# Altium PCB IOT_PRoject_4layers.PcbDoc
Units mm, origin at the board's own origin, x right, y up, seen from the top; angles counter-clockwise.
Board outline 71 x 108.3 mm, 4 copper layers (Top Signal, +3.3V, GND, Bottom Signal), stack 0.603 mm thick; 54 components, 47 nets, 220 pads, 70 vias.
Unrouted connection lines stored in the file: 6.
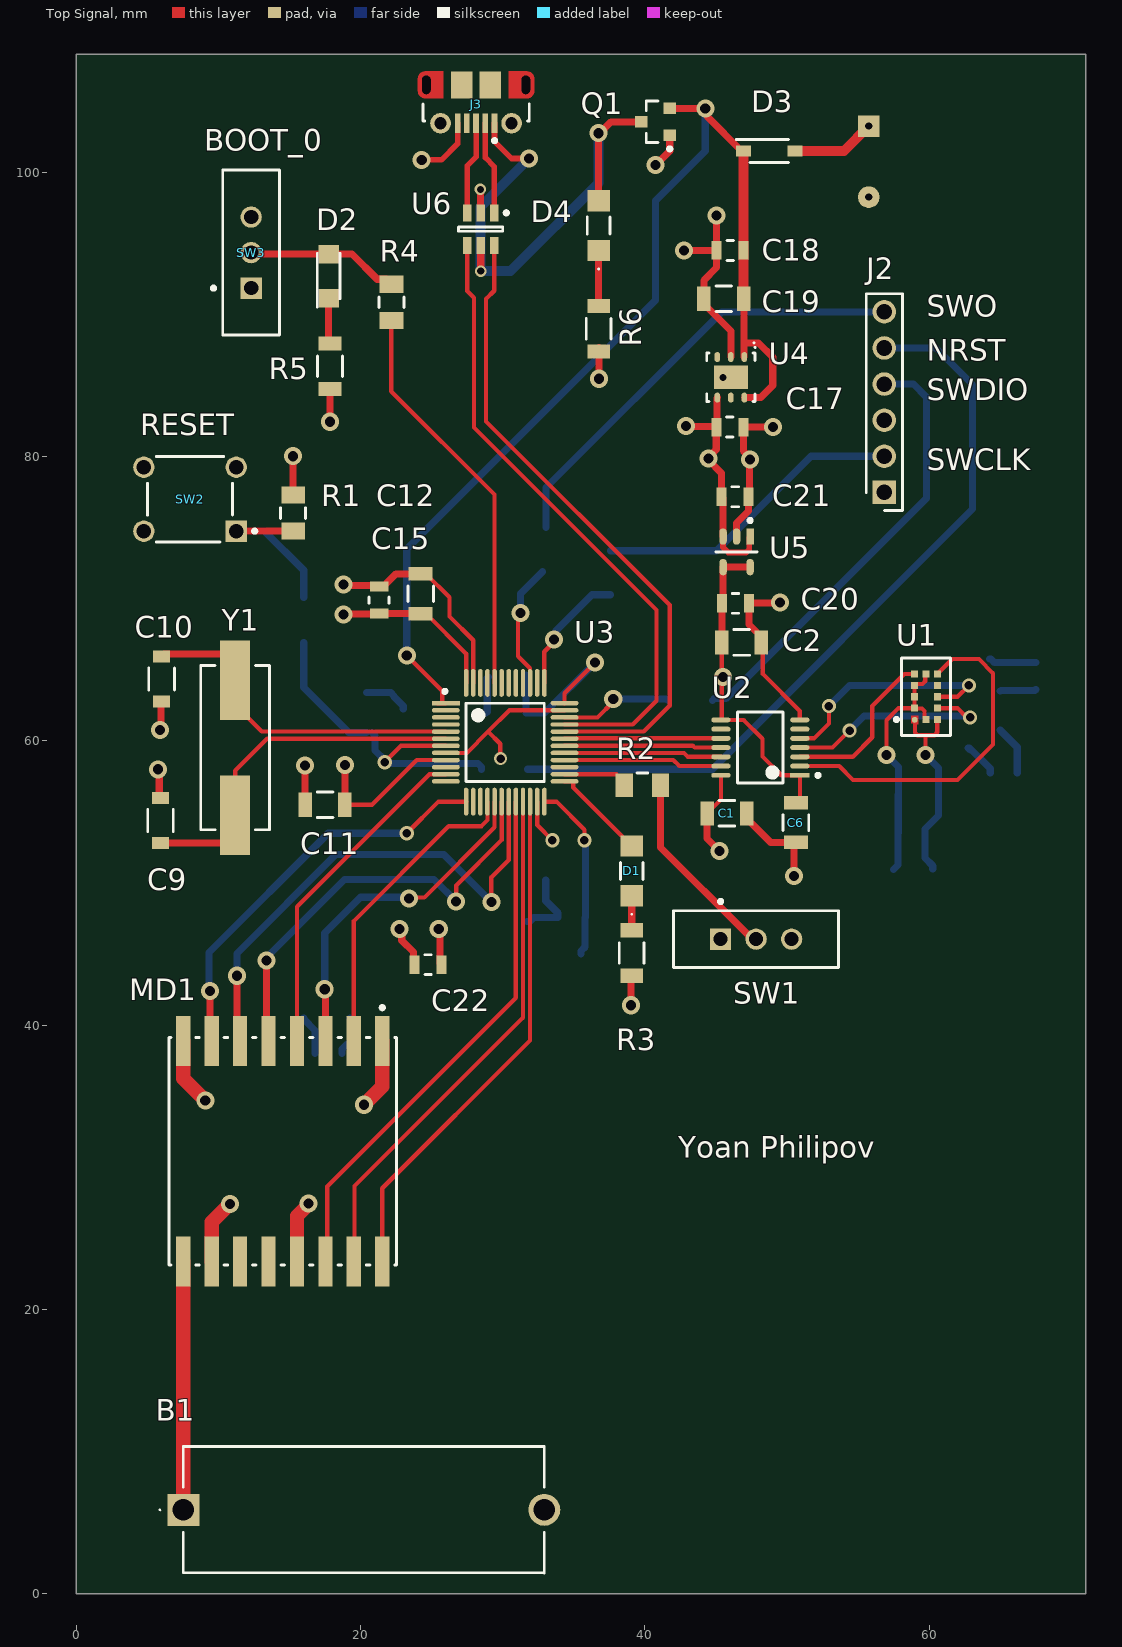
[diagram p0: Top Signal view]
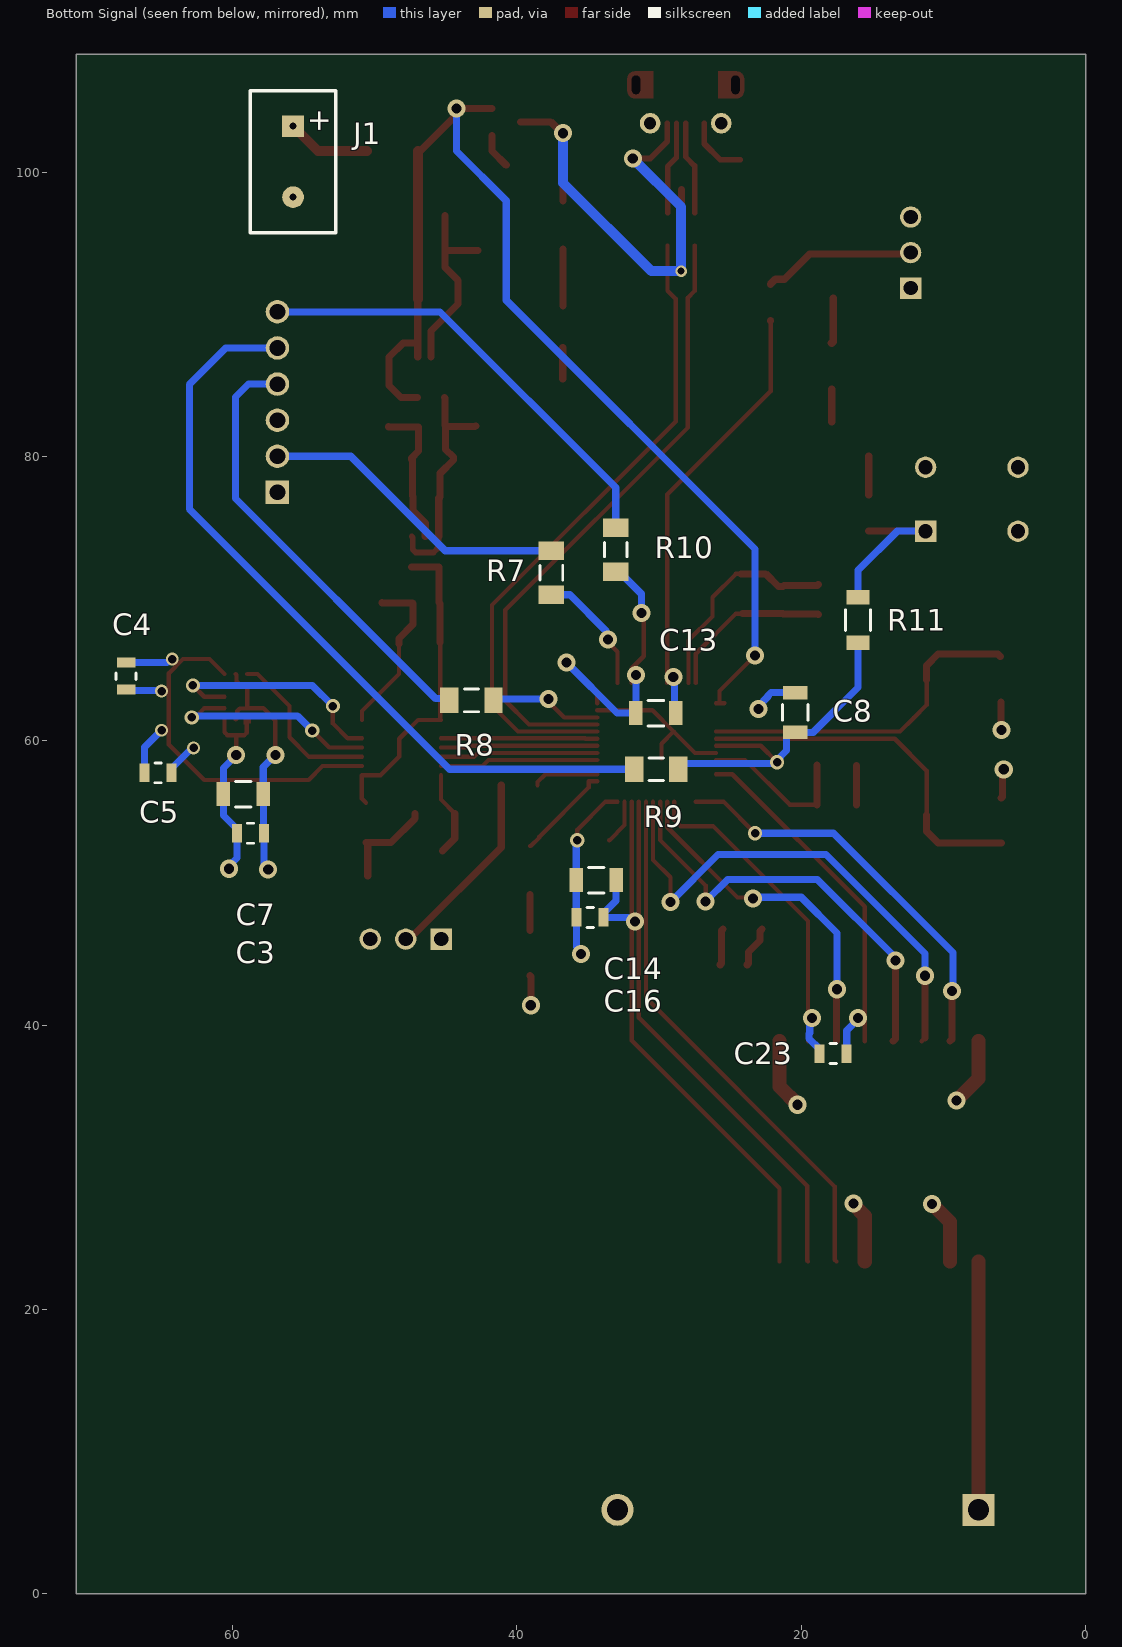
[diagram p1: Bottom Signal view, seen from below]
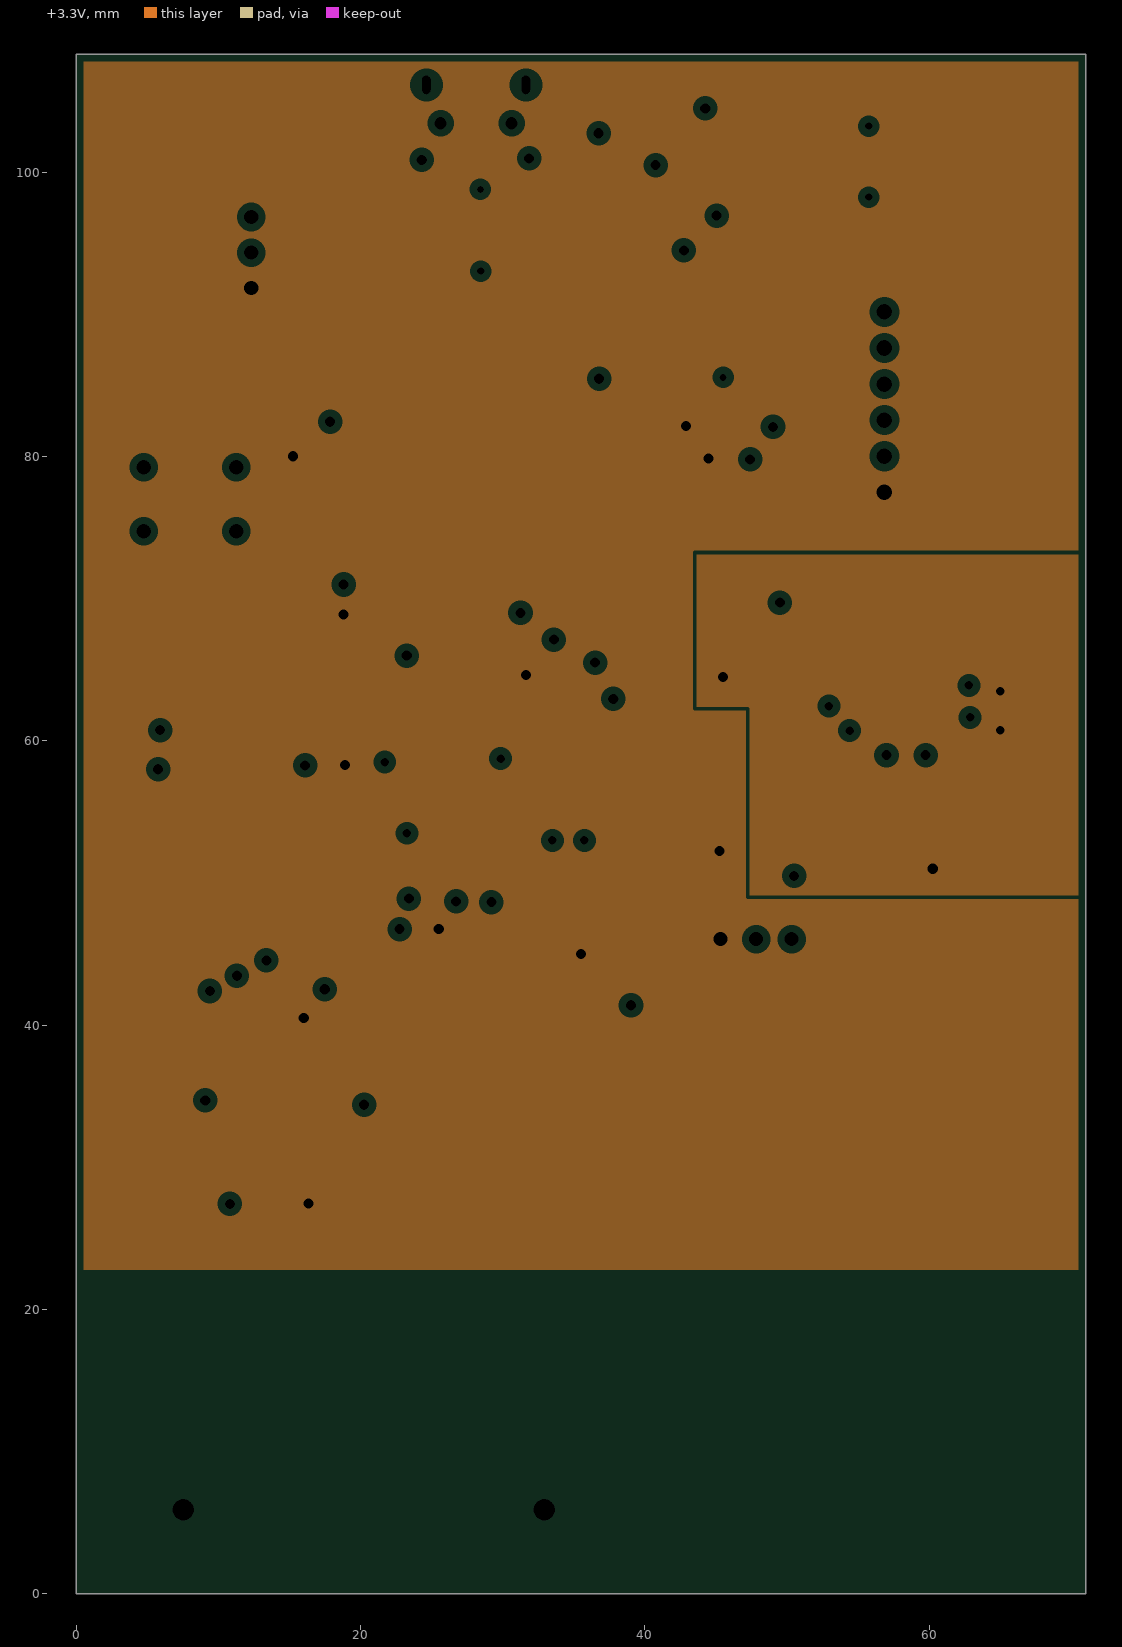
[diagram p2: +3.3V, clearances drawn from the general rule]
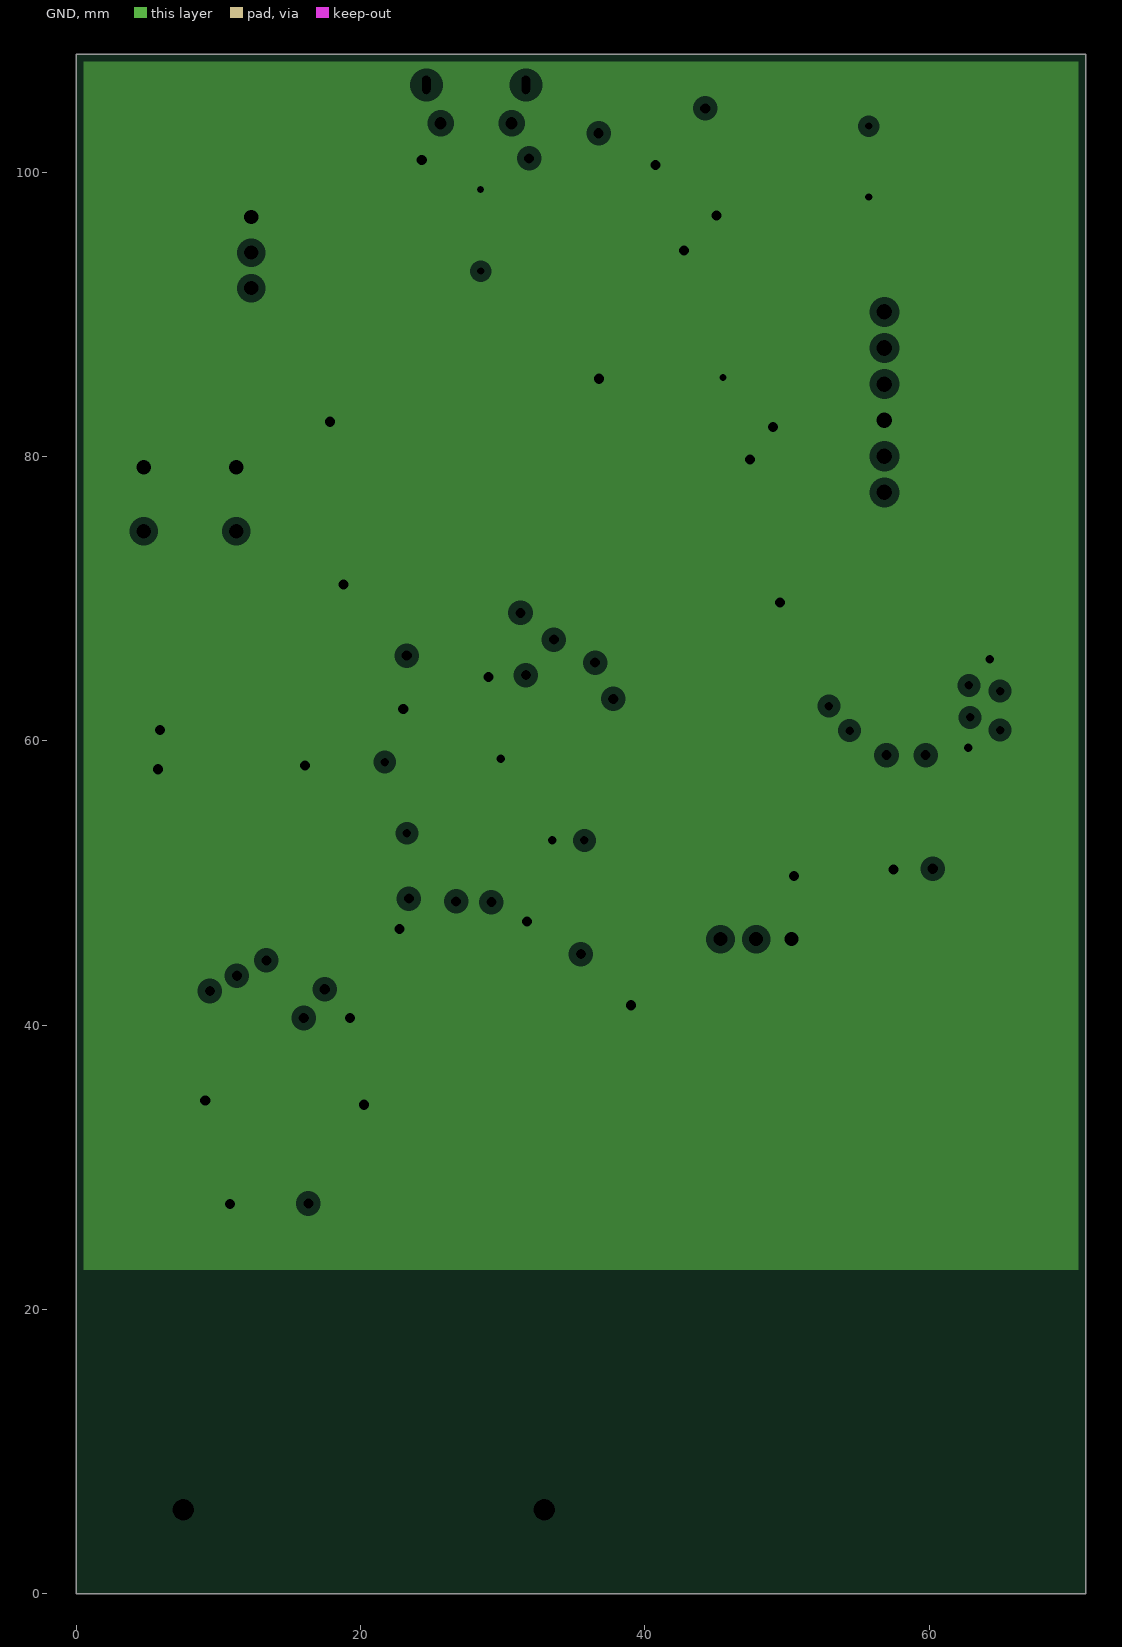
[diagram p3: GND, clearances drawn from the general rule]

## Layer stack, top to bottom
Top Solder: solder mask 0.0102, Solder Resist, Dk 3.5
Top Signal: signal copper 0.0356
Dielectric 2: prepreg 0.0711, PP-006, Dk 4.1
+3.3V: plane copper 0.035, net (Multiple Nets)
Dielectric 1: dielectric 0.32, FR-4, Dk 4.8
GND: plane copper 0.035, net GND
Dielectric 3: prepreg 0.0711, PP-006, Dk 4.1
Bottom Signal: signal copper 0.0356
Bottom Solder: solder mask 0.0102, Solder Resist, Dk 3.5

## Board outline
0,0 71,0 71,108.3 0,108.3

## Design rules (kind name [scope] priority, off if disabled: settings)
Clearance Clearance_3 [All] p1: gap=0.25 ignorepadtopadclearanceinfootprint=FALSE
Clearance Clearance_1 [OnMid vs OnMid] p2: gap=0.254 ignorepadtopadclearanceinfootprint=FALSE sourcerule=38 cellrowname=All cellrowtype=0 cellcolname=All cellcoltype=0 innerlayers=TRUE
Clearance Clearance_2 [(ExistsOnLayer('Top Signal') Or ExistsOnLayer('Bottom Signal')) vs (ExistsOnLayer('Top Signal') Or ExistsOnLayer('Bottom Signal'))] p3: gap=0.254 ignorepadtopadclearanceinfootprint=FALSE sourcerule=38 cellrowname=All cellrowtype=0 cellcolname=All cellcoltype=0 outerlayers=TRUE
Clearance [All] p4: gap=0.254 ignorepadtopadclearanceinfootprint=FALSE ismatrix=TRUE
DiffPairsRouting [All] p1: maxlimit=0.254 minlimit=0.254 mostfreqgap=0.254 toplayer_minwidth=0.381 toplayer_maxwidth=0.381 toplayer_prefwidth=0.381 bottomlayer_minwidth=0.381 bottomlayer_maxwidth=0.381 bottomlayer_prefwidth=0.381 maxuncoupledlength=12.7
HoleSize [All] p1: absolutevalues=TRUE maxlimit=6 minlimit=0.3 maxpercent=80.000 minpercent=20.000
PlaneClearance [All] p1: clearance=0.508
PlaneConnect [All] p1: planeconnectstyle=Direct reliefexpansion=0.508 reliefentries=4 reliefconductorwidth=0.254 reliefairgap=0.254
PolygonConnect [All] p1: connectstyle=Relief reliefconductorwidth=0.254 reliefentries=4 polygonreliefangle="90 Angle" airgapwidth=0.254
RoutingVias [All] p1: holewidth=0.711 width=1.27 viastyle="Through Hole" minholewidth=0.711 minwidth=1.27 maxholewidth=0.711 maxwidth=1.27
SolderMaskExpansion [All] p1: expansion=0.102 istentingtop=FALSE
Width MaxMinWidth_1 [All] p1: maxlimit=1 minlimit=0.3 preferedwidth=0.5 minimp=50.000000 maximp=50.000000 favimp=50.000000
Width [All] p2: maxlimit=0.254 minlimit=0.254 preferedwidth=0.254
26 further rules are at their usual default settings.

## Classes and differential pairs
component class VL53L3CX: C1 C2 C3 C4 C5 C6 C7 U1 U2
component class RFM95: B1 C22 C23 MD1
component class MCU: C8 C9 C10 C11 C12 C13 C14 C15 C16 D1 D2 R1 R2 R3 R4 R5 R11 SW1 SW2 SW3 U3 Y1
component class Connectors: J2 J3 R7 R8 R9 R10 U6
component class Board_Power: C17 C18 C19 C20 C21 D3 D4 J1 Q1 R6 U4 U5
differential pair D_USB_CONN: +USB_CONN_P -USB_CONN_N

## Components (designator, comment, footprint, x,y, rotation, side; value= is the part's Value field where it differs from the comment)
B1 "ANT-868-HETH" ANT-868-HETH-Footprint-1 20.225,5.9 r0 top
C1 "100nF" FP-C1206C-EB-MFG 45.775,54.9 r0 top
C2 "100nF" FP-C1206C-EB-MFG 46.8,66.925 r0 top
C3 "4u7" FP-GRM21B-0_15-MFG 58.75,53.5 r180 bottom
C4 "4u7" FP-GRM21B-0_15-MFG 67.5,64.55 r90 bottom
C5 "4u7" FP-GRM21B-0_15-MFG 65.25,57.75 r180 bottom
C6 "100nF" FP-C1206C-EB-MFG 50.625,54.25 r270 top
C7 "100nF" FP-C1206C-EB-MFG 59.25,56.25 r180 bottom
C8 "100nF" FP-C1206C-EB-MFG 20.425,62 r90 bottom
C9 "27pF" FP-GCM31A-0_2-MFG 5.925,54.4 r90 top
C10 "27pF" FP-GCM31A-0_2-MFG 6,64.35 r270 top
C11 "100nF" FP-C1206C-EB-MFG 17.5,55.5 r180 top
C12 "100nF" FP-C1206C-EB-MFG 24.225,70.35 r90 top
C13 "100nF" FP-C1206C-EB-MFG 30.225,61.95 r180 bottom
C14 "100nF" FP-C1206C-EB-MFG 34.425,50.2 r180 bottom
C15 "4u7" FP-GRM21B-0_15-MFG 21.3,69.9 r90 top
C16 "4u7" FP-GRM21B-0_15-MFG 34.85,47.575 r180 bottom
C17 "4u7" FP-GRM21B-0_15-MFG 45.975,82.075 r0 top
C18 "4u7" FP-GRM21B-0_15-MFG 46,94.5 r180 top
C19 "100nF" FP-C1206C-EB-MFG 45.55,91.1 r180 top
C20 "4u7" FP-GRM21B-0_15-MFG 46.375,69.675 r0 top
C21 "4u7" FP-GRM21B-0_15-MFG 46.35,77.175 r0 top
C22 "4u7" FP-GRM21B-0_15-MFG 24.75,44.25 r180 top
C23 "4u7" FP-GRM21B-0_15-MFG 17.75,38 r0 bottom
D1 "GREEN" 156120VS75000-Footprint-1 39.075,50.85 r90 top
D2 "RED" 156120RS75000-Footprint-1 17.75,92.7 r90 top
D3 "B5819W-TP" B5819W-TP-Footprint-1 48.75,101.5 r0 top
D4 "GREEN" 156120VS75000-Footprint-1 36.75,96.25 r90 top
J1 "232" 1043P-Footprint-1 55.75,100.75 r90 bottom
J2 "M20-9990645" M20-9990645-Footprint-1 56.85,77.48 r90 top
J3 "105017-0001" USB-MICRO-B_V 28.125,104.8 r180 top
MD1 "RFM95W-868S2" FP-RFM95W-868S2-MFG 14.525,31.125 r270 top
Q1 "NTR1P02T1G" ONSC-SOT-23-3-318-08_V 40.75,103.55 r180 top
R1 "10k" FP-RMCF1206-IPC_C 15.25,76.026 r270 top
R2 "10k" FP-RMCF1206-IPC_C 39.825,56.875 r0 top
R3 "1k" FP-RMCF1206-MFG 39.075,45.075 r270 top
R4 "10k" FP-RMCF1206-IPC_C 22.175,90.85 r90 top
R5 "1k" FP-RMCF1206-MFG 17.85,86.35 r270 top
R6 "1k" FP-RMCF1206-MFG 36.75,89 r270 top
R7 "22R" RESC3216X60X45ML10T20 37.575,71.825 r90 bottom
R8 "22R" RESC3216X60X45ML10T20 43.2,62.85 r0 bottom
R9 "22R" RESC3216X60X45ML10T20 30.2,58 r0 bottom
R10 "22R" RESC3216X60X45ML10T20 33.05,73.45 r90 bottom
R11 "1k" FP-RMCF1206-MFG 16,68.5 r270 bottom
SW1 "EG1218" ESWI-EG1218_V 47.825,46.05 r0 top
SW2 "B3F-1000" OMRON-B3F-1000-4_V 8,77 r180 top
SW3 "EG1218" ESWI-EG1218_V 12.3,94.35 r90 top
U1 "VL53L3CXV0DH/1" FP-LGA-12-DM00392521-MFG 59.775,63.1 r0 top
U2 "TXS0104EQPWRQ1" FP-PW0014A-IPC_C 48.125,59.525 r180 top
U3 "STM32L412CBT6" FP-LQFP48-5B-IPC_A 30.175,59.9 r0 top
U4 "LD39050PU33R" DFN6D_L 46.05,85.575 r270 top locked
U5 "MIC5504-2.8YM5-TR" FP-SOT23-5LD-PL-1-IPC_C 46.45,73.3 r270 top
U6 "USBLC6-2SC6" STM-SOT23-6L_V 28.45,96 r270 top
Y1 "ABLS-8.000MHZ-B2-T" FP-ABLS-MFG 11.175,59.525 r90 top

## Footprints (in the part's own frame and the unit in brackets; to place one, negate y for a bottom-side part, rotate by r counter-clockwise, add the part's x,y. Pads: shape width x height; smd on the part's side, far side on the other; paste and mask are expansions set on the pad)
1043P-Footprint-1 [mm]
  round 1.524 hole 0.5: 1(-2.5,0)
  rect 1.524x1.524 hole 0.5: 2(2.5,0)
  silkscreen extent -5,-3 5,3
156120RS75000-Footprint-1 [mm]
  rect 1.3x1.45 smd: 1(-1.55,0) 2(1.55,0)
  silkscreen extent -2.2,-0.8 1.6,0.8
156120VS75000-Footprint-1 [mm]
  rect 1.5x1.6 smd: 1(-1.75,0) 2(1.75,0)
  silkscreen extent -3.1,-0.8 0.6,0.8
ANT-868-HETH-Footprint-1 [mm]
  rect 2.25x2.25 hole 1.5: 1(-12.7,0)
  round 2.25 hole 1.5: 2(12.7,0)
  silkscreen extent -14.4,-4.45 12.7,4.45
B5819W-TP-Footprint-1 [mm]
  rect 1.05x0.75 smd: 1(-1.8,0) 2(1.8,0)
  silkscreen extent -2.32,-0.8 1.35,0.8
DFN6D_L [mm] "SON, 6-Leads, Body 3x3mm, Pitch 0.95mm, Thermal Pad 2.4x1.65mm, IPC High Density"
  oval 0.7x0.4 smd: 1(-1.425,0.95) 2(-1.425,0) 3(-1.425,-0.95) 4(1.425,-0.95) 5(1.425,0) 6(1.425,0.95)
  rect 1.65x2.4 smd: 7(0,0)
  silkscreen extent -2.15,-1.7 1.7,1.75, body extent -1.55,-1.55 1.55,1.55, height 0.95
ESWI-EG1218_V [mm] "THD, 3-Leads, Body 11.6x4mm, Pitch 2.5mm"
  rect 1.5x1.5 hole 1: 1(-2.5,0)
  round 1.5 hole 1: 2(0,0) 3(2.5,0)
  silkscreen extent -5.8,-2 5.8,2.77, body extent -5.8,-2 5.8,2, height 7.4
FP-ABLS-MFG [mm]
  rect 5.6x2.1 smd paste+0 mask+0: 1(-4.75,0) 2(4.75,0)
  silkscreen extent -5.77,-2.42 5.77,2.42, body extent -7.65,-2.52 7.65,2.52, height 0.25
FP-C1206C-EB-MFG [mm]
  rect 0.95x1.7 smd paste+0 mask+0: 1(-1.4,0) 2(1.4,0)
  silkscreen extent -0.55,-0.9 0.55,0.9, body extent -2,-1 2,1, height 0.25
FP-GCM31A-0_2-MFG [mm]
  rect 0.85x1.2 smd paste+0 mask+0: 1(-1.575,0) 2(1.575,0)
  silkscreen extent -0.77,-0.9 0.77,0.9, body extent -2.1,-1 2.1,1, height 0.25
FP-GRM21B-0_15-MFG [mm]
  rect 0.7x1.3 smd paste+0 mask+0: 1(-0.95,0) 2(0.95,0)
  silkscreen extent -0.23,-0.7 0.23,0.7, body extent -1,-0.63 1,0.63, height 1.4
FP-LGA-12-DM00392521-MFG [mm]
  round 0.412 smd paste+0 mask+0: 1(-0.791,-1.621)
  rect 0.5x0.5 smd paste+0 mask+0: 2(-0.8,-0.8) 3(-0.8,0) 4(-0.8,0.8) 5(-0.8,1.6) 6(0,1.6) 7(0.8,1.6) 8(0.8,0.8) 9(0.8,0) 10(0.8,-0.8) 11(0.8,-1.6) 12(0,-1.6)
  Top Signal region: -1.05,-1.35 -1.05,-1.85 -0.8,-1.85 -0.8,-1.93 -0.55,-1.93 -0.55,-1.35
  silkscreen extent -2.2,-2.73 1.73,2.73, body extent -1.73,-2.73 1.73,2.73, height 0.25
FP-LQFP48-5B-IPC_A [mm]
  rect 1.955x0.312 smd paste+0 mask+0: 1(-4.175,2.75)
  rrect100% 1.955x0.312 smd paste+0 mask+0: 2(-4.175,2.25) 3(-4.175,1.75) 4(-4.175,1.25) 5(-4.175,0.75) 6(-4.175,0.25) 7(-4.175,-0.25) 8(-4.175,-0.75) 9(-4.175,-1.25) 10(-4.175,-1.75) 11(-4.175,-2.25) 12(-4.175,-2.75) 25(4.175,-2.75) 26(4.175,-2.25) 27(4.175,-1.75) 28(4.175,-1.25) 29(4.175,-0.75) 30(4.175,-0.25) 31(4.175,0.25) 32(4.175,0.75) 33(4.175,1.25) 34(4.175,1.75) 35(4.175,2.25) 36(4.175,2.75)
  rrect100% 0.312x1.955 smd paste+0 mask+0: 13(-2.75,-4.175) 14(-2.25,-4.175) 15(-1.75,-4.175) 16(-1.25,-4.175) 17(-0.75,-4.175) 18(-0.25,-4.175) 19(0.25,-4.175) 20(0.75,-4.175) 21(1.25,-4.175) 22(1.75,-4.175) 23(2.25,-4.175) 24(2.75,-4.175) 37(2.75,4.175) 38(2.25,4.175) 39(1.75,4.175) 40(1.25,4.175) 41(0.75,4.175) 42(0.25,4.175) 43(-0.25,4.175) 44(-0.75,4.175) 45(-1.25,4.175) 46(-1.75,4.175) 47(-2.25,4.175) 48(-2.75,4.175)
  silkscreen extent -4.38,-2.75 2.75,3.71, body extent -5.65,-5.65 5.65,5.65, height 0.25
FP-PW0014A-IPC_C [mm]
  rect 1.355x0.341 smd paste+0 mask+0: 1(-2.775,1.95)
  rrect100% 1.355x0.341 smd paste+0 mask+0: 2(-2.775,1.3) 3(-2.775,0.65) 4(-2.775,0) 5(-2.775,-0.65) 6(-2.775,-1.3) 7(-2.775,-1.95) 8(2.775,-1.95) 9(2.775,-1.3) 10(2.775,-0.65) 11(2.775,0) 12(2.775,0.65) 13(2.775,1.3) 14(2.775,1.95)
  silkscreen extent -4.18,-2.5 1.6,2.5, body extent -3.55,-2.6 3.55,2.6, height 0.25
FP-RFM95W-868S2-MFG [mm]
  rect 3.5x1 smd paste+0 mask+0: 1(-7.75,7) 2(-7.75,5) 3(-7.75,3) 4(-7.75,1) 5(-7.75,-1) 6(-7.75,-3) 7(-7.75,-5) 8(-7.75,-7) 9(7.75,-7) 10(7.75,-5) 11(7.75,-3) 12(7.75,-1) 13(7.75,1) 14(7.75,3) 15(7.75,5) 16(7.75,7)
  silkscreen extent -10.22,-8 8,8, body extent -9.6,-8.1 9.6,8.1, height 0.25
FP-RMCF1206-IPC_C [mm]
  rect 1.204x1.658 smd paste+0 mask+0: 1(-1.276,0) 2(1.276,0)
  silkscreen extent -0.37,-0.87 0.37,0.87, body extent -1.98,-0.97 1.98,0.97, height 0.25
FP-RMCF1206-MFG [mm]
  rect 1x1.6 smd paste+0 mask+0: 1(-1.6,0) 2(1.6,0)
  silkscreen extent -0.72,-0.87 0.72,0.87, body extent -2.2,-0.97 2.2,0.97, height 0.25
FP-SOT23-5LD-PL-1-IPC_C [mm]
  rect 1.156x0.53 smd paste+0 mask+0: 1(-1.075,0.95)
  rrect100% 1.156x0.53 smd paste+0 mask+0: 2(-1.075,0) 3(-1.075,-0.95) 4(1.075,-0.95) 5(1.075,0.95)
  silkscreen extent -2.33,-1.45 0,1.45, body extent -1.75,-1.55 1.75,1.55, height 0.25
M20-9990645-Footprint-1 [mm]
  rect 1.65x1.65 / inner round 1.65 / far side rect 1.65x1.65 hole 1.1: 1(0,0)
  round 1.65 hole 1.1: 2(2.54,0) 3(5.08,0) 4(7.62,0) 5(10.16,0) 6(12.7,0)
  silkscreen extent -1.27,-1.27 13.97,1.27
OMRON-B3F-1000-4_V [mm] "TH, 4-Leads, Body 6x6mm"
  rect 1.5x1.5 hole 1 paste-2539.97: 1(-3.25,2.25)
  round 1.5 hole 1 paste-2539.97: 2(3.25,2.25) 4(3.25,-2.25)
  round 1.5 hole 1 paste-2539.97 mask+0.102: 3(-3.25,-2.25)
  silkscreen extent -4.68,-3 3,3, body extent -3.4,-3 3.4,3, height 4.5
ONSC-SOT-23-3-318-08_V [mm] "SOT23, 3-Leads, Body 2.92x1.3mm, Pitch 0.95mm"
  rect 0.9x0.8 smd: 1(-1,0.95) 2(-1,-0.95) 3(1,0)
  silkscreen extent -1.13,-1.46 0.65,2.02, body extent -0.65,-1.46 0.65,1.46, height 1.11
RESC3216X60X45ML10T20 [mm] "Chip Resistor, 2-Leads, Body 3.20x1.60mm, IPC Low Density"
  rect 1.3x1.8 smd: 1(-1.55,0) 2(1.55,0)
  silkscreen extent -0.5,-0.8 0.5,0.8, body extent -1.65,-0.85 1.65,0.85, height 0.6
STM-SOT23-6L_V [mm] "SOT23, 6-Leads, Body 3.05x1.75mm, Pitch 0.95mm"
  rect 1.2x0.6 smd: 1(-1.15,0.95) 2(-1.15,0) 3(-1.15,-0.95) 4(1.15,-0.95) 5(1.15,0) 6(1.15,0.95)
  silkscreen extent -1.27,-1.55 0.15,1.93, body extent -1.6,-1.53 1.6,1.53, height 1.45
USB-MICRO-B_V [mm] "USB, MICRO B, Body 7.491x4.695 mm, Pitch 0.65 mm"
  rect 0.4x1.35 smd: 1(-1.3,1.35) 2(-0.65,1.35) 3(0,1.35) 4(0.65,1.35) 5(1.3,1.35)
  round 1.45 hole 0.85: 6(-2.5,1.35) 7(2.5,1.35)
  rrect50% 0x0 hole 0.6 slot 1.3 at 90 deg: 8(-3.5,-1.35) 11(3.5,-1.35)
  rect 1.5x1.9 smd: 9(-1,-1.35) 10(1,-1.35)
  Top Signal circle w0.5: c-3.6,-1.8 r0.25
  Top Signal circle w0.5: c-3.6,-0.9 r0.25
  Top Signal circle w0.5: c3.6,-1.8 r0.25
  Top Signal circle w0.5: c3.6,-0.9 r0.25
  Top Signal region: -3.6,-1.8 -3.6,-0.9 -4.1,-0.9 -4.1,-1.8
  Top Signal region: 3.6,-0.9 3.6,-1.8 4.1,-1.8 4.1,-0.9
  Top Signal region: 2.3,-0.4 2.3,-2.3 3.6,-2.3 3.6,-0.4
  Top Signal region: -2.3,-2.3 -2.3,-0.4 -3.6,-0.4 -3.6,-2.3
  silkscreen extent -3.75,-0.01 3.75,2.7, body extent -4.1,-3.9 4.1,1.5, height 2.67

## Part data
B1: library part CMP-00030-00001-2, "RF/Microwave Antenna"
C1 C2 C6 C7 C8 C11 C12 C13 C14 C19: library part CMP-03020-021070-1, "CAP CER 0.1UF 16V 10% X7R 1206"
C3 C4 C5 C15 C16 C17 C18 C20 C21 C22 C23: library part CMP-06035-005997-1, "Chip Multilayer Ceramic Capacitors for General Purpose, 0805, 4.7uF, X7R, 15%, 10%, 10V"
C9 C10: library part CMP-06035-011656-1, "Ceramic Capacitor for Automotive 27pF ±1% 1kVDC C0G 1206 Paper T/R"
D1 D4: library part CMP-007-00036-1, "Single Color LED"
D2: library part CMP-007-00037-1, "Single Color LED"
D3: library part CMP-004-00032-1, "Rectifier Diode, Schottky, 1 Phase, 1 Element, 1A, 40V V(RRM), Silicon"
J1: library part CMP-00029-00001-3, "Batteries/Accessories"
J2: library part CMP-002-00072-1, "Board Connector, 6 Contact(s), 1 Row(s), Male, Straight, 0.1 inch Pitch, Solder Terminal, Locking, Black Insulator"
J3: library part CMP-2000-05827-1, "Micro-USB B Receptacle, Right Angle, Bottom Mount, Surface Mount, with Solder Tabs, -30 to 85 degC, 5-Pin USB, RoHS, Tape and Reel"
MD1: library part CMP-204316-000001-1, "RX TXRX MODULE ISM < 1GHZ SMD"
Q1: library part CMP-1058-00751-1, "Power MOSFET, -20 V, -1 A, P-Channel, 3-Pin SOT-23, Pb-Free, Tape and Reel"
R1 R2 R4: library part CMP-26527-000061-1, "10kΩ ±5% 0.25W 1206 Thick Film Chip Resistor AEC-Q200 compliant"
R3 R5 R6 R11: library part CMP-26527-000044-1, "1kΩ ±5% 0.25W 1206 Thick Film Chip Resistor AEC-Q200 compliant"
R7 R8 R9 R10: library part CMP-2003-01966-1
SW1 SW3: library part CMP-011-00006-2, "Slide Switch, SPDT, 500 V, -20 to 70 degC, 3-Pin THD, RoHS, Bulk"
SW2: library part CMP-011-00004-2, "Tactile Switch, SPST-NO, 0.05 A, 24 V, -25 to 70 degC, 4-Pin THD, RoHS, Bulk"
U1: library part CMP-12178-000002-1, "TIME-OF-FLIGHT PROXIMITY SENSOR"
U2: library part CMP-04899-000064-1, "IC TRNSLTR BIDIRECTIONAL 14TSSOP"
U3: library part CMP-12105-000110-1, "IC MCU 32BIT 128KB FLASH 48LQFP"
U4: library part CMP-0244-00288-1, "500 mA Low Quiescent Current Low Noise Voltage Regulator, 3.3V, 6-Pin VDFDPN, Tape and Reel"
U5: library part CMP-06324-000050-1, "IC REG LINEAR 2.8V 300MA SOT23-5"
U6: library part CMP-00024-00006-1, "Trans Voltage Suppressor Diode, 5V V(RWM), Unidirectional, 1 Element, Silicon"
Y1: library part CMP-27762-009874-1, "CRYSTAL 8.0000MHZ 18PF SMD"

## Via types
v1: diameter 1.27, hole 0.711, Top Signal to Bottom Signal, 24 vias
v2: diameter 1.27, hole 0.711, Top Signal to GND, 13 vias
v3: diameter 1.27, hole 0.711, Top Signal to +3.3V, 8 vias
v4: diameter 1, hole 0.6, Top Signal to Bottom Signal, 7 vias
v5: diameter 1.27, hole 0.711, GND to Bottom Signal, 5 vias
v6: diameter 1.27, hole 0.711, +3.3V to Bottom Signal, 4 vias
v7: diameter 0.9, hole 0.6, GND to Bottom Signal, 2 vias
v8: diameter 0.9, hole 0.6, +3.3V to Bottom Signal, 2 vias
v9: diameter 0.8, hole 0.5, Top Signal to GND, 2 vias
v10: diameter 1, hole 0.6, Top Signal to GND, 1 vias
v11: diameter 0.9, hole 0.6, Top Signal to GND, 1 vias
v12: diameter 0.8, hole 0.5, Top Signal to Bottom Signal, 1 vias

## Nets (pads, with @x,y where several pads share a name; then routed paths per layer and width w, separated by ;. In a path a pad name is that pad's centre, name@x,y a point inside that pad or via, vN(x,y) a via of type N, cw(c..) or ccw(c..) an arc to the next point about the centre after c; other vN are vias at no path point)
+2.8V: C2.1 C3.1 C4.1 C5.1 C6.1 C7.1 C20.1 U1.1 U1.11 U2.1 U2.8 U5.4 U5.5 | length 42.8
  Top Signal w0.3: U2.8 U2.8@45.381,61.475 ; C2.1 45.4,61.494 U2.8@45.381,61.475 ; C6.1 50.92,55.945 50.92,57.556 U2.1 49.6,57.575 48.275,58.9 48.275,60.15 46.95,61.475 U2.8@45.381,61.475 ; U1.1 59.002,61.46 59.002,60.576 59.178,60.4 59.75,60.4 ; 59.75,58.997 59.75,60.4 ; U1.11 60.575,60.6 60.375,60.4 59.75,60.4
  Top Signal w0.5: C2.1 45.412,66.938 45.412,69.663 C20.1 45.494,69.744 45.494,72.219 U5.4 U5.5
  Bottom Signal w0.5: 59.75,59 60.65,58.1 C7.1 60.65,54.75 59.7,53.8 59.7,51.758 60.25,51.208 v6(60.25,51) ; 62.75,59.5 62.897,59.353 ; v8(65,60.75) 66.2,59.55 C5.1 ; v8(65,63.5) 65.05,63.55 67.45,63.55 C4.1
  other v3: 45.5,64.5
+3.3V: C1.1 C11.1 C12.1 C13.1 C14.1 C15.1 C16.1 C17.1 C21.1 C22.1 C23.1 J2.1 MD1.13 R1.1 SW1.1 SW3.1 U2.14 U3.9 U3.24 U3.36 U3.48 U4.4 U5.1 U5.3 | length 83.3
  Top Signal w0.3: C11.1 20.8,55.5 23.95,58.65 U3.9 ; C12.1@24.112,68.95 C12.1 24.6,68.95 27.425,66.125 U3.48 ; U3.24 33.775,55.725 35.75,53.75 35.75,53 ; U3.36 34.35,63.35 36.5,65.5 ; C1.1 45.35,55.875 U2.14
  Top Signal w0.4: U5.3 45.5,73.625 45.875,73.25 47.114,73.25 47.335,73.471 47.335,74.31 U5.1
  Top Signal w0.5: R1.1 v3(15.25,80.026) ; v3(18.8,68.9) 18.825,68.925 21.275,68.925 C15.1@21.288,68.937 ; C11.1 v3(18.9,58.3) ; C15.1 C12.1@24.112,68.95 ; v3(25.5,46.75) 25.6,46.65 25.6,44.35 C22.1 ; v3(42.9,82.15) 42.938,82.112 C17.1@44.988,82.112 ; C1.1 44.375,53.125 v3(45.25,52.25) ; U4.4 45.063,84.112 45.063,82.187 C17.1@44.988,82.112 ; U5.3 45.5,77.075 C21.1 45.4,78.825 44.475,79.75 v3(44.475,79.854) 44.475,79.958 45.025,80.508 C17.1 C17.1@44.988,82.112
  Top Signal w1: MD1.13 15.525,26.577 16.325,27.377 v1(16.325,27.45)
  Bottom Signal w0.5: v6(16,40.5) 16,40.424 16.8,39.624 C23.1 ; v6(31.625,64.625) C13.1 32.95,61.95 36.5,65.5 ; v6(35.5,45) 35.5,45.208 35.8,45.508 C16.1 ; C16.1@35.825,47.568 C14.1 35.825,52.925
+Vbat: D3.2 J1.2 | length 5.9
  Top Signal w0.7: D3.2 54,101.5 J1.2
DIO0: MD1.14 U3.20 | length 37.9
  Top Signal w0.3: MD1.14 17.649,23.499 17.649,28.649 30.925,41.925 U3.20
DIO1: MD1.15 U3.21 | length 37.3
  Top Signal w0.3: MD1.15 19.574,23.424 19.574,28.674 31.425,40.525 U3.21
DIO2: MD1.16 U3.22 | length 36.7
  Top Signal w0.3: MD1.16 21.525,28.525 31.925,38.925 U3.22
DIO5: MD1.7 U3.13 | length 28.8
  Top Signal w0.3: v4(23.25,53.5) 25.475,55.725 U3.13
  Top Signal w0.5: v1(9.4,42.4) 9.4,39 MD1.7
  Bottom Signal w0.3: v1@9.326,42.474 v1(9.4,42.4)
  Bottom Signal w0.5: v1@9.326,42.474 9.326,45.101 17.725,53.5 v4(23.25,53.5)
GND: C1.2 C2.2 C3.2 C4.2 C5.2 C6.2 C7.2 C8.2 C9.2 C10.2 C11.2 C12.2 C13.2 C14.2 C15.2 C16.2 C17.2 C18.2 C19.2 C20.2 C21.2 C22.2 C23.2 J1.1 J2.3 J3.5 MD1.1 MD1.8 MD1.10 Q1.1 R3.2 R5.2 R6.2 SW1.3 SW2.3 SW2.4 SW3.3 U1.2 U1.3 U1.4 U1.6 U1.12 U2.7 U3.8 U3.23 U3.35 U3.47 U4.2 U4.7 U5.2 U6.2 | length 150
  Top Signal w0.3: C12.2 24.6,71.75 26.25,70.1 26.25,68.75 27.925,67.075 U3.47 ; U3.8 27.475,59.15 28.975,60.65 ; v11(29.85,58.75) 29.825,58.775 29.825,59.8 28.975,60.65 ; U3.23 32.425,54.075 v10(33.5,53) ; U3.35 30.475,62.15 28.975,60.65 ; C2.2@48.299,66.826 48.299,64.701 50.9,62.1 U2.7 ; 57,59 57,61.45 57.85,62.3 U1.2 ; U1.12 59.675,61.6 59.675,62.099 59.499,62.275 59,62.275 U1.2 ; U1.6 59.725,64.65 59.725,64.2 59.525,64 59.075,64 U1.4 U1.3 U1.2
  Top Signal w0.4: v2(24.3,100.875) 25.69,100.875 26.825,102.01 J3.5
  Top Signal w0.5: v1(5.75,58) 5.837,57.912 5.837,56.063 C9.2 ; v1@5.95,60.8 C10.2@5.95,62.725 ; C11.2 v2(16.1,58.275) ; v2(17.85,82.45) R5.2 ; v2(18.8,71) 18.875,70.925 21.225,70.925 C15.2 21.6,70.85 22.5,71.75 C12.2 ; v2(22.75,46.75) 22.897,46.603 22.897,45.953 23.711,45.139 23.711,44.339 C22.2 ; U6.2@28.425,97.175 v9(28.425,98.8) ; v2(36.775,85.475) R6.2@36.775,87.675 ; v1(39.025,41.4) 39.025,43.425 R3.2 ; v2(40.75,100.5) 41.75,101.5 Q1.1 ; v2(42.75,94.5) C18.2 ; v2(45.05,96.95) C18.2 ; U4.2 46.05,88.825 44.15,90.725 44.15,92.4 45.05,93.3 C18.2 ; U5.2 46.45,75.325 47.3,76.175 C21.2 47.35,77.225 47.35,79.754 v2(47.4,79.804) 47.4,79.908 46.925,80.383 C17.2 46.938,82.087 v2(49.013,82.087) v2@49.025,82.1 ; C1.2 47.175,54.525 48.85,52.85 C6.2 50.5,52.725 v2(50.5,50.5) ; C2.2@48.299,66.826 48.299,67.201 47.325,68.175 C20.2 47.35,69.7 49.475,69.7 v2(49.5,69.725)
  Top Signal w1: MD1.8 7.525,36.25 v1(9.075,34.7) ; MD1.10 9.525,26.15 v1(10.8,27.425) ; v1(20.25,34.4) 21.525,35.675 MD1.1
  Bottom Signal w0.5: C23.2 18.7,38.3 19.465,39.065 19.465,39.396 19.397,39.464 19.397,40.353 v5(19.25,40.5) ; C8.2 22.121,63.4 22.355,63.166 22.355,63.103 23,62.458 v5(23,62.25) ; C13.2 28.912,62.038 28.912,64.412 v5(29,64.5) ; v5(31.7,47.3) 31.908,47.3 32.183,47.575 C16.2 33.9,47.875 33.025,48.75 C14.2 ; 57,59.25 57,59 57.85,58.15 C7.2 57.825,56.225 57.825,53.525 C3.2 57.8,51.258 v5(57.5,50.958) ; v7(62.75,59.5) 62.85,59.5 64.3,58.05 C5.2 ; v7(64.25,65.75) 64.358,65.75 64.608,65.5 C4.2
  other v1: 5.9,60.75
  other v9: 45.5,85.575
MISO: MD1.2 U3.16 | length 22.1
  Top Signal w0.3: MD1.2 19.525,47.325 26.2,54 28.5,54 28.925,54.425 U3.16
MOSI: MD1.3 U3.17 | length 24.5
  Top Signal w0.3: v1(17.475,42.525) v1@17.525,42.475 ; v1(23.4,48.9) 23.485,48.985 24.485,48.985 29.425,53.925 U3.17
  Top Signal w0.5: MD1.3 v1@17.525,42.475
  Bottom Signal w0.5: v1(17.475,42.525) 17.475,46.475 20,49 23.3,49 v1(23.4,48.9)
NetB1_1: B1.1 MD1.9 | length 17.5
  Top Signal w1: B1.1 MD1.9
NetC9_1: C9.1 U3.6 Y1.1 | length 25.6
  Top Signal w0.3: Y1.1 11.175,57.9 13.425,60.15 U3.6
  Top Signal w0.5: C9.1 10.375,52.825 11.175,53.625 Y1.1
NetC10_1: C10.1 U3.5 Y1.2 | length 24
  Top Signal w0.3: Y1.2 11.175,62.525 12.075,61.625 13.05,60.65 U3.5
  Top Signal w0.5: C10.1 6.175,66.1 6.643,66.1 10.375,66.1 11.175,65.3 Y1.2
NetD1_1: D1.1 R3.1 | length 2.5
  Top Signal w0.5: R3.1 D1.1@39.075,49.2
NetD1_2: D1.2 U3.25 | length 6.9
  Top Signal w0.3: U3.25 34.95,57.15 34.955,57.144 34.955,56.719 38.425,53.25 38.425,53.2 39.025,52.6 D1.2
NetD2_1: D2.1 R5.1 | length 3.3
  Top Signal w0.5: D2.1 17.75,88.05 R5.1 R5.1@17.9,88
NetD2_2: D2.2 R4.2 SW3.2 | length 10.8
  Top Signal w0.5: SW3.2 12.4,94.25 D2.2 19.4,94.25 21.173,92.477 21.823,92.477 R4.2
NetD4_1: D4.1 R6.1 | length 4
  Top Signal w0.5: R6.1 D4.1 D4.1@36.75,94.6
NetJ2_2: J2.2 R7.2 | length 22
  Bottom Signal w0.5: R7.2 45.05,73.375 51.695,80.02 J2.2
NetJ2_4: J2.4 R8.2 | length 31.4
  Bottom Signal w0.5: R8.2 44.866,62.966 45.716,62.966 59.8,77.05 59.8,84.191 58.891,85.1 J2.4
NetJ2_5: J2.5 R9.2 | length 54.9
  Bottom Signal w0.5: R9.2 44.75,58 63.05,76.3 63.05,85.075 60.485,87.64 J2.5
NetJ2_6: J2.6 R10.2 | length 31.7
  Bottom Signal w0.5: R10.2 33.05,77.825 45.405,90.18 J2.6
NetR1_2: R1.2 R11.1 SW2.1 SW2.2 | length 11.8
  Top Signal w0.5: SW2.1 R1.2
  Bottom Signal w0.5: SW2.1 13.25,74.75 16,72 R11.1
NetR2_1: R2.1 U3.26 | length 4.7
  Top Signal w0.3: U3.26 38.002,57.65 38.549,57.102 R2.1
NetR2_2: R2.2 SW1.2 | length 13.8
  Top Signal w0.5: R2.2 41.101,52.499 47.127,46.473 47.131,46.473 47.554,46.05 SW1.2
NetR4_1: R4.1 U3.44 | length 28.5
  Top Signal w0.3: R4.1@22.15,89.549 22.15,84.6 29.425,77.325 U3.44
  Top Signal w0.5: R4.1@22.15,89.549 R4.1
NetR7_1: R7.1 U3.37 | length 8.9
  Top Signal w0.3: U3.37 32.925,66.266 33.6,66.941 v1(33.6,67.125)
  Bottom Signal w0.5: v1(33.6,67.125) 33.747,67.272 33.747,67.747 36.275,70.275 R7.1
NetR8_1: R8.1 U3.34 | length 8
  Top Signal w0.3: U3.34 36.675,61.65 37.775,62.75 v1(37.775,62.95)
  Bottom Signal w0.5: v1(37.775,62.95) 41.55,62.95 R8.1
NetR10_1: R10.1 U3.39 | length 8.9
  Top Signal w0.3: v1(31.25,69) 31.075,68.825 31.075,65.95 31.923,65.102 31.923,64.078 U3.39
  Bottom Signal w0.5: v1(31.25,69) 31.25,70.35 R10.1@32.8,71.9
NetU1_5: U1.5 U2.3 | length 11.8
  Top Signal w0.3: U2.3 54.625,58.875 56,60.25 56,62.45 58.25,64.7 U1.5
NetU1_7: U1.7 U2.2 | length 24.8
  Top Signal w0.3: U2.2 53.675,58.225 54.65,57.25 62,57.25 64.5,59.75 64.5,64.75 63.5,65.75 61.625,65.75 U1.7
NetU1_9: U1.9 U2.5 | length 16.7
  Top Signal w0.3: U2.5 51.9,60.175 52.95,61.225 v4(52.95,62.45) ; U1.9 62,63.1 v4(62.8,63.9)
  Bottom Signal w0.5: v4(52.95,62.45) 54.4,63.9 v4(62.8,63.9)
NetU1_10: U1.10 U2.4 | length 15.5
  Top Signal w0.3: U2.4 53.2,59.525 v4(54.4,60.725) ; U1.10 61.991,62.3 62.641,61.65 v4(62.875,61.65)
  Bottom Signal w0.5: v4(54.4,60.725) 55.425,61.75 v4@62.875,61.75
NetU2_13: U2.13 U3.28 | length 11.2
  Top Signal w0.3: U3.28 42,58.65 42.425,58.225 U2.13
NRST: C8.1 R9.1 R11.2 U3.7 | length 23.2
  Top Signal w0.3: v4(21.7,58.5) 22.85,59.65 U3.7
  Bottom Signal w0.5: R11.2 16,63.75 19.15,60.6 C8.1 ; C8.1@20.8,60.6 21.025,60.375 21.025,59.31 21.7,58.635 v4(21.7,58.5) 21.796,58.404 22.149,58.404 22.154,58.4 28.25,58.4 28.5,58.15 R9.1@28.5,58
NSS: MD1.5 U3.18 | length 30.6
  Top Signal w0.3: v1(26.725,48.7) 26.725,49.825 29.925,53.025 U3.18
  Top Signal w0.5: v1(13.375,44.55) 13.375,39.025 MD1.5
  Bottom Signal w0.5: v1(13.375,44.55) 13.375,44.758 18.867,50.25 25.175,50.25 v1(26.725,48.7)
RFM_NRST: MD1.6 U3.19 | length 36
  Top Signal w0.3: MD1.6@11.3,39.1 MD1.6 ; v1(29.2,48.65) 29.2,50.4 30.425,51.625 U3.19
  Top Signal w0.5: MD1.6@11.3,39.1 v1(11.3,43.475)
  Bottom Signal w0.5: v1(11.3,43.475) 11.3,45.05 18.25,52 25.85,52 v1(29.2,48.65)
SCK: MD1.4 U3.11 | length 23.8
  Top Signal w0.3: MD1.4 15.525,48.325 24.85,57.65 U3.11
SCL: U2.11 U3.30 | length 11.1
  Top Signal w0.3: U3.30 43.375,59.65 43.5,59.525 U2.11
SDA: U2.10 U3.31 | length 11
  Top Signal w0.3: U3.31 35.175,60.15 35.2,60.175 U2.10
USB_+5V: D4.2 J3.1 Q1.3 U6.5 | length 37.7
  Top Signal w0.4: J3.1 29.425,102.175 30.625,100.975 v1(31.85,100.975)
  Top Signal w0.5: v12(28.45,93.05) U6.5 ; D4.2 v1(36.75,102.75) 36.826,102.75 37.626,103.55 Q1.3
  Bottom Signal w0.7: 28.45,97.575 v12(28.45,93.05) 30.55,93.05 36.75,99.25 v1(36.75,102.75) ; 28.5,97.625 v1(31.85,100.975)
USB_CONN_N: J3.2 U6.1 | length 6.6
  Top Signal w0.38: J3.2 28.775,101.025 29.4,100.4 U6.1
USB_CONN_P: J3.3 U6.3 | length 6.6
  Top Signal w0.38: U6.3 27.5,100.45 28.125,101.075 J3.3
USB_N: U3.32 U6.6 | length 46.1
  Top Signal w0.3: U6.6 29.4,91.669 28.825,91.094 28.825,82.475 41.75,69.55 41.75,62.475 39.925,60.65 U3.32
USB_P: U3.33 U6.4 | length 44.7
  Top Signal w0.3: U6.4 27.5,91.65 27.975,91.175 27.975,82.05 40.825,69.2 40.825,62.825 39.15,61.15 U3.33
Vbat_adc_in: C18.1 C19.1 D3.1 Q1.2 U3.1 U4.1 U4.6 | length 80.4
  Top Signal w0.3: v1(23.25,66) 25.75,63.5 25.75,62.656 25.756,62.65 U3.1 25.406,62.65 U3.1@25.4,62.656
  Top Signal w0.5: Q1.2 v1(44.25,104.5) 44.397,104.353 44.397,103.903 46.8,101.5 D3.1 ; C19.1 46.975,91.075 46.975,88 ; U4.1@46.975,87.025 46.975,88 ; U4.6 48.15,84.15 49,85 49,87 48,88 46.975,88
  Top Signal w0.7: C19.1 46.95,94.515 D3.1
  Bottom Signal w0.5: v1(23.25,66) 23.25,73.5 40.75,91 40.75,98 44.25,101.5 v1(44.25,104.5)
XSHUT: U2.12 U3.29 | length 11.1
  Top Signal w0.3: U3.29 42.75,59.15 43.025,58.875 U2.12
pads on no net: B1.2 J3.4 J3.6 J3.7 J3.8 J3.9 J3.10 J3.11 MD1.11 MD1.12 U1.8 U2.6 U2.9 U3.2 U3.3 U3.4 U3.10 U3.12 U3.14 U3.15 U3.27 U3.38 U3.40 U3.41 U3.42 U3.43 U3.45 U3.46 U4.3 U4.5
copper on no net:
  other v1: 57,59 59.75,59 36.5,65.5
  other v4: 35.75,53

## Polygon pours and split planes (outlines as drawn)
+2.8V on +3.3V (split plane): 70.49,49.129 47.379,49.129 47.379,62.25 47.37,62.3 47.342,62.342 47.3,62.37 47.25,62.379 43.629,62.379 43.629,73.121 70.49,73.121
+3.3V on +3.3V (split plane): 70.49,73.379 43.5,73.379 43.45,73.37 43.408,73.342 43.38,73.3 43.371,73.25 43.371,62.25 43.38,62.2 43.408,62.158 43.45,62.13 43.5,62.121 47.121,62.121 47.121,49 47.13,48.95 47.158,48.908 47.2,48.88 47.25,48.871 70.49,48.871 70.49,22.75 0.51,22.75 0.51,107.79 70.49,107.79
GND on GND (split plane): 70.49,22.75 0.51,22.75 0.51,107.79 70.49,107.79

## Other copper
GND (plane layer: these items are gaps in the copper):
  pour cut-out: 0,22.75 71,22.75 71,0 0,0
+3.3V (plane layer: these items are gaps in the copper):
  pour cut-out: 0,22.75 71,22.75 71,0 0,0
  lines w0.254: 71,49 47.25,49 47.25,62.25 43.5,62.25 43.5,73.25 71,73.25

## Silkscreen, mask and mechanical layers (free items; w line width, h text height)
Top Overlay:
  circle w0.1: c47.675,88 r0.05
  text "BOOT_0" at 9.004,101.508 h1.52
  text "SWO" at 59.829,89.854 h1.52
  text "NRST" at 59.829,86.754 h1.52
  text "SWDIO" at 59.829,83.954 h1.52
  text "RESET" at 4.504,81.504 h1.52
  text "SWCLK" at 59.829,79.054 h1.52
  text "Yoan Philipov" at 42.354,30.662 h1.52

## Text inside footprints (layer, text, board x,y; h text height)
J1: Bottom Overlay "+" at 53.25,102.754 h1.52 r270
J3: Mechanical 1 "PCB EDGE" at 22.567,107.886 h0.3 r180